# Altium PCB AO-VI.PcbDoc
Units mil, origin at the board's own origin, x right, y up, seen from the top; angles counter-clockwise.
Board outline 12846.15 x 9153.85 mil, 2 copper layers (TopLayer, BottomLayer); 52 components, 46 nets, 149 pads, 335 vias.
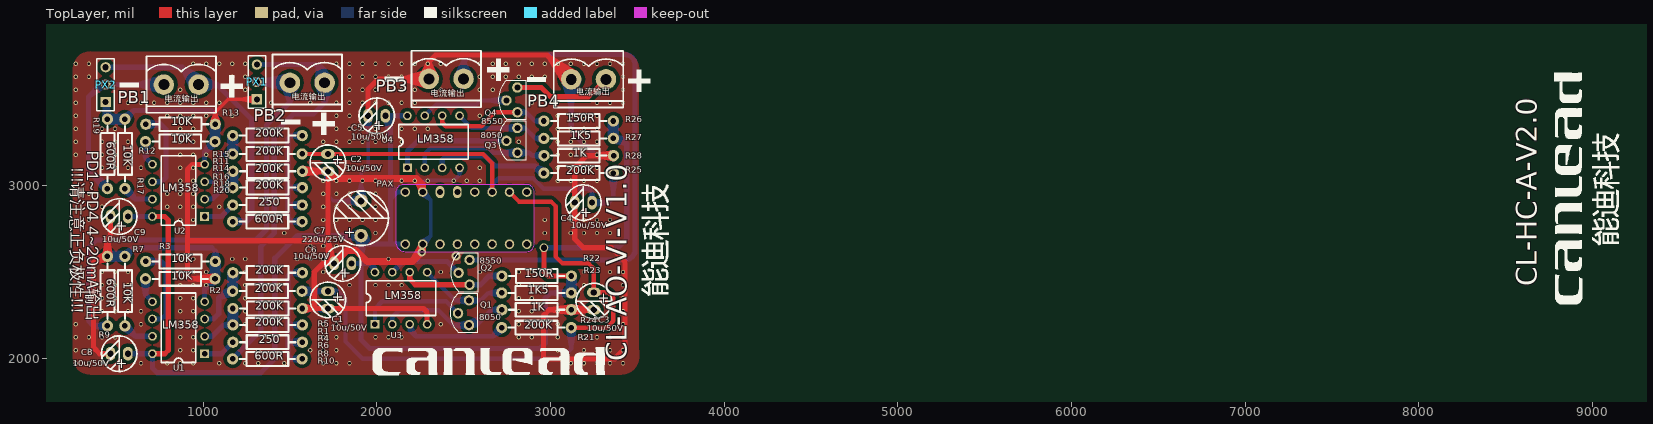
[diagram p0: TopLayer view]
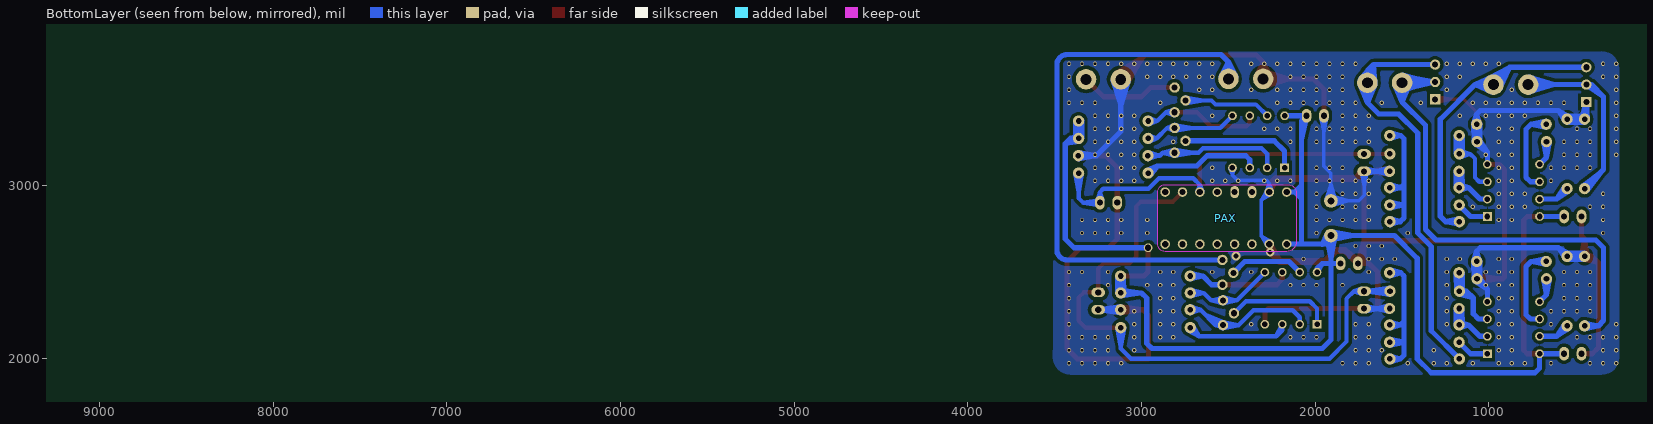
[diagram p1: BottomLayer view, seen from below]
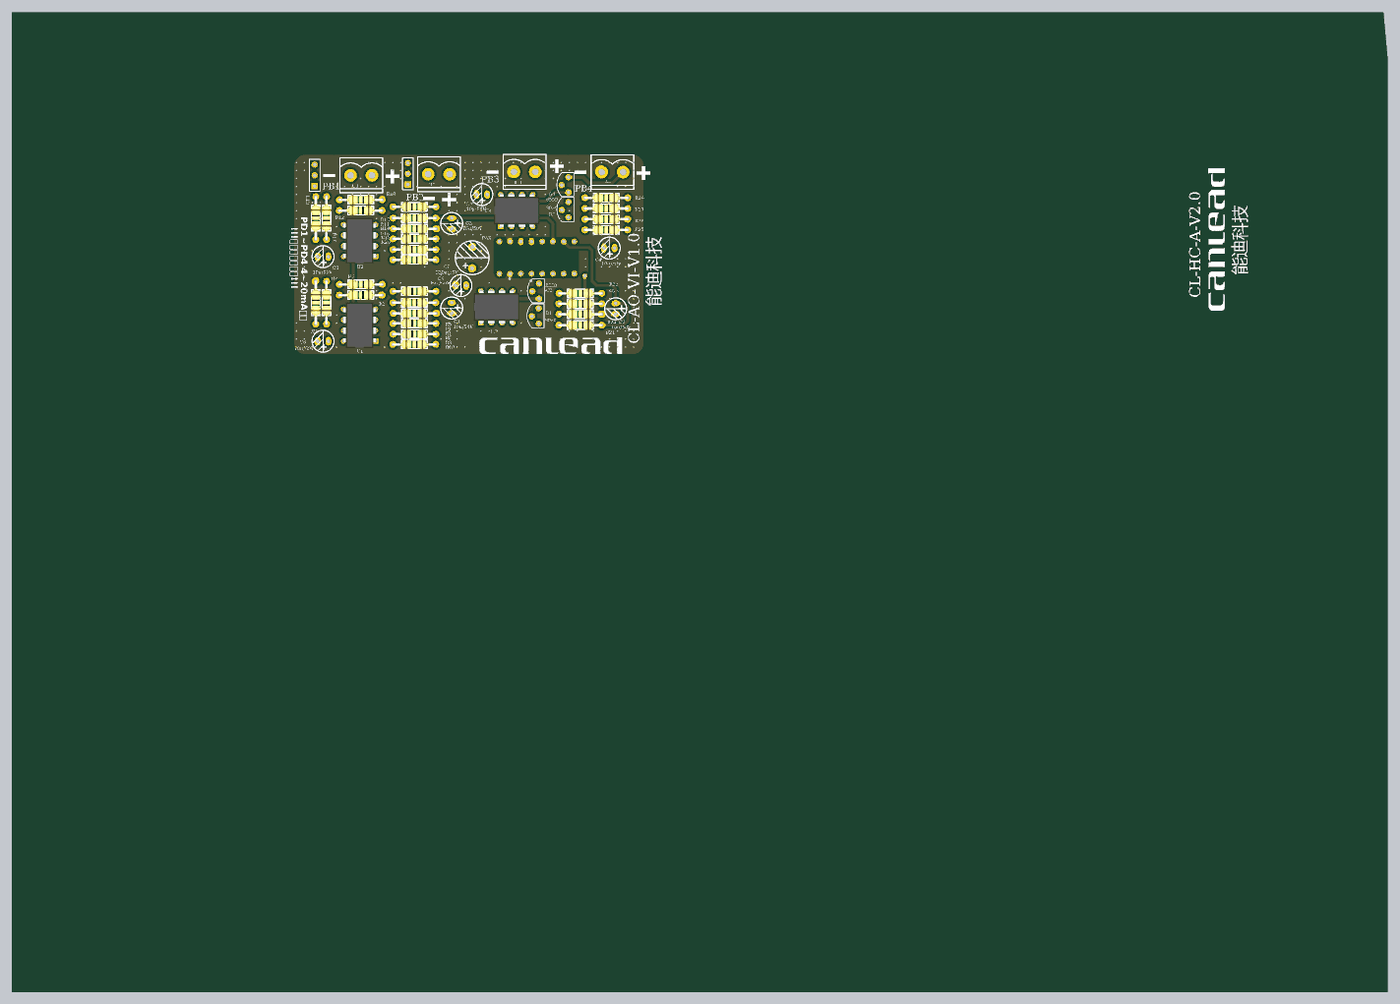
[diagram p2: 3D render of the assembled board from above, using the file's embedded part models]

## Layer stack, top to bottom
TopLayer: signal copper 1.4
Dielectric: dielectric 12.6, FR-4, Dk 4.8
BottomLayer: signal copper 1.4

## Board outline
10420.05,5102.18 -2387.64,5102.18 -2387.64,-4051.66 10458.51,-4051.66 10458.51,4679.11

## Design rules (kind name [scope] priority, off if disabled: settings)
Clearance Clearance_1 [All] p1: gap=20
Clearance [All] p2 off: gap=15
ComponentClearance [All] p1 off: gap=10 collisioncheckmode=3 verticalgap=10 showdistances=FALSE
FabricationTestPointUsage TestPointUsage [All] p1: valid=0 allowmultiple=FALSE
FabricationTestpoint Testpoint [All] p1: side=3 testpointundercomponent=TRUE minsize=40 maxsize=100 preferedsize=60 minholesize=20 maxholesize=40 preferedholesize=32 testpointgrid=1 allowsidetop=TRUE allowsidebottom=TRUE usegrid=TRUE gridtolerance=0.01
PolygonConnect PolygonConnect_1 [All vs (InPadClass('All Pads'))] p1: connectstyle=NoConnect reliefconductorwidth=10 reliefentries=4 polygonreliefangle="90 Angle"
PolygonConnect [All] p2: connectstyle=Direct reliefconductorwidth=10 reliefentries=4 polygonreliefangle="90 Angle"
RoomDefinition AO-VI [InComponentClass('AO-VI')] p1: confinementstyle=ConfineIn formatcopy=TRUE lockcomponents=FALSE outline 10503.51,-4096.2 21729.86,-4096.2 21729.86,-3053.79 10503.51,-3053.79
RoutingVias [All] p1: holewidth=24 width=40 viastyle="Through Hole" minholewidth=24 minwidth=40 maxholewidth=24 maxwidth=40
SilkscreenOverComponentPads [IsPad] p1: minsilkscreentomaskgap=10
SolderMaskExpansion [All] p1: expansion=4
Width [All] p1: maxlimit=300 minlimit=10 preferedwidth=30
24 further rules are at their usual default settings.

## Components (designator, comment, footprint, x,y, rotation, side; value= is the part's Value field where it differs from the comment)
C1 "10u/50V" E5MM 1719.12,2390 r270 top
C2 "10u/50V" E5MM 1719.12,3180 r270 top
C3 "10u/50V" E5MM 3250,2383.15 r270 top
C4 "10u/50V" E5MM 3240,2900 r180 top
C5 "10u/50V" E5MM 2050,3400 r180 top
C6 "10u/50V" E5MM 1854.55,2550 r180 top
C7 "220u/25V" E8MM 1910,2810 r90 top
C8 "10u/50V" E5MM 567.31,2030 r180 top
C9 "10u/50V" E5MM 567.31,2820 r180 top
PAX "Header 8X2" centipede-16 2514.54,2810.96 r90 bottom (schematic designator P19)
PB1 "电流输出" PL2X 874.36,3579.46 r180 top (schematic designator PB2)
PB2 "电流输出" PL2X 1600,3590 r180 top (schematic designator PB1)
PB3 "电流输出" PL2X 2400,3612.32 r180 top
PB4 "电流输出" PL2X 3220,3610 r180 top
PX1 "Header 3" HDR1X3 1310,3494.49 r90 top
PX2 "Header 3" HDR1X3 439.46,3479.46 r90 top
Q1 "8050" TO-92-B 2500,2265.76 r0 top
Q2 "8550" TO-92-B 2503.16,2498.64 r0 top
Q3 "8050" TO-92-B 2778.46,3258.64 r0 top
Q4 "8550" TO-92-B 2778.46,3491.36 r0 top
R1 "200K" AXIAL0.4 1569.48,2389.63 r180 top
R2 "10K" AXIAL0.4 1068.36,2460.89 r180 top
R3 "10K" AXIAL0.4 1069.93,2560.89 r180 top
R4 "200K" AXIAL0.4 1571.91,2290 r180 top
R5 "200K" AXIAL0.4 1172.44,2496.51 r0 top
R6 "200K" AXIAL0.4 1172.44,2196.51 r0 top
R7 "10K" AXIAL0.4 549.63,2191.05 r90 top
R8 "250" AXIAL0.4 1172.44,2096.51 r0 top
R9 "600R" AXIAL0.4 450,2590 r270 top
R10 "600R" AXIAL0.4 1570,2000 r180 top
R11 "200K" AXIAL0.4 1570,3180 r180 top
R12 "10K" AXIAL0.4 1068.36,3250.89 r180 top
R13 "10K" AXIAL0.4 1069.93,3350.89 r180 top
R14 "200K" AXIAL0.4 1571.91,3080 r180 top
R15 "200K" AXIAL0.4 1171.91,3286.14 r0 top
R16 "200K" AXIAL0.4 1172.44,2986.51 r0 top
R17 "10K" AXIAL0.4 549.63,2981.05 r90 top
R18 "250" AXIAL0.4 1171.91,2886.14 r0 top
R19 "600R" AXIAL0.4 450,3380 r270 top
R20 "600R" AXIAL0.4 1570,2790 r180 top
R21 "200K" AXIAL0.4 3119.48,2179.63 r180 top
R22 "150R" AXIAL0.4 3120.53,2477.12 r180 top
R23 "1K5" AXIAL0.4 3119.48,2379.63 r180 top
R24 "1K" AXIAL0.4 3120,2282.78 r180 top
R25 "200K" AXIAL0.4 3362.15,3069.63 r180 top
R26 "150R" AXIAL0.4 3362.15,3369.63 r180 top
R27 "1K5" AXIAL0.4 3362.15,3269.63 r180 top
R28 "1K" AXIAL0.4 3363.2,3170 r180 top
U1 "LM358" DIP8 1008.89,2030 r180 top
U2 "LM358" DIP8 1008.89,2820 r180 top
U3 "LM358" DIP8 1990,2199.64 r90 top
U4 "LM358" DIP8 2176.93,3100 r90 top

## Footprints (in the part's own frame and the unit in brackets; to place one, negate y for a bottom-side part, rotate by r counter-clockwise, add the part's x,y. Pads: shape width x height; smd on the part's side, far side on the other; paste and mask are expansions set on the pad)
AXIAL0.4 [mil]
  round 65 hole 32: 1(-0.52,-0.37) 2(399.48,-0.37)
  silkscreen extent 39,-40 359,40, body extent -12,-45 412,46, height 116
centipede-16 [mil]
  round 55 hole 36: 1(150,-350) 2(-150,-350) 3(150,-250) 4(-150,-250) 6(-150,-150) 8(-150,-50) 9(150,50) 10(-150,50) 11(150,150) 12(-150,150) 13(150,250) 14(-150,250) 15(150,350) 16(-150,350)
  oval 70x50 hole 36: 5(150,-150) 7(150,-50)
DIP8 [mil]
  rect 50x50 hole 32: 1(0,0)
  round 50 hole 32: 2(0,-100) 3(0,-200) 4(0,-300) 5(300,-300) 6(300,-200) 7(300,-100) 8(300,0)
  silkscreen extent 50,-350 250,50, body extent -5,-364 305,66, height 188
E5MM [mm]
  oval 1.4x2 hole 0.9: 1(0,0) 2(2.54,0)
  silkscreen extent -1.33,-2.6 3.87,2.6
E8MM [mm]
  round 2 hole 1: 1(-2.54,0) 2(2.54,0)
  silkscreen extent -4,-4 4,4, body extent -4.01,-4.04 4.01,3.99, height 7
HDR1X3 [mm] "Connector; Header; 3 Position"
  rect 1.5x1.5 hole 0.9: 1(0,0)
  round 1.5 hole 0.9: 2(2.54,0) 3(5.08,0)
  silkscreen extent -1.27,-1.27 6.35,1.27
PL2X [mm]
  round 3 hole 1.6: 1(-2.54,0) 2(2.54,0)
  silkscreen extent -5.08,-4.13 5.08,4.13
TO-92-B [mil]
  round 60 hole 35.43: 1(31.54,71.36) 2(-31.54,-2.99) 3(31.54,-71.36)
  silkscreen extent -77,-111 81,114

## Part data
C1 C2 C3 C4 C5 C6 C7 C8 C9: library part CAP, "Capacitor"
PAX: "Header, 8-Pin, Du"
PB1 PB2 PB3 PB4: library part "Header 2", "Header, 2-Pin"
PX1 PX2: "Header, 3-Pin"
Q1 Q3: library part NPN, "NPN Bipolar Transistor"
Q2 Q4: library part PNP, "PNP Bipolar Transistor"
R1 R2 R3 R4 R5 R6 R7 R8 R9 R10 R11 R12 R13 R14 R15 R16 R17 R18 R19 R20 R21 R22 R23 R24 R25 R26 R27 R28: library part RES2

## Free pads (board coordinates)
  round 50 hole 36: 0(2962.68,2640)

## Via types
v1: diameter 25, hole 15, TopLayer to BottomLayer, tented both sides, 333 vias
v2: diameter 50, hole 28, TopLayer to BottomLayer, tented both sides, 2 vias

## Nets (pads, with @x,y where several pads share a name; then routed paths per layer and width w, separated by ;. In a path a pad name is that pad's centre, name@x,y a point inside that pad or via, vN(x,y) a via of type N, cw(c..) or ccw(c..) an arc to the next point about the centre after c; other vN are vias at no path point)
10V-面板-温度输入: PAX.16
10V-面板-湿度输入: PAX.15
24V: C5.1 C6.1 C7.1 C8.1 C9.1 pad.0 PAX.1 PAX.2 R22.1 R23.1 R26.1 R27.1 U1.8 U2.8 U3.8 U4.8 | length 13753.1
  TopLayer w30: U1.8 780,2030 800,2050 800,2800 780,2820 U2.8 ; 2962.68,2525 pad.0 2962.68,2500.5 2985.7,2477.49 R22.1
  BottomLayer w30: C8.1 U1.8 708.89,1946.62 735.51,1920 1332.02,1920 1413.48,2001.46 1413.48,2580 1543.48,2710 C7.1 ; C9.1 U2.8 C9.1@593.89,2820 ; C6.1 1910,2550 ; C7.1@1874.21,2697.71 1910,2661.92 ; C7.1@1885.74,2707.7 1910,2580.63 C7.1@1934.26,2707.7 ; C7.1@1907.7,2685.74 1780.63,2710 C7.1@1907.7,2734.26 ; 1960.05,2659.95 1959.04,2660.96 ; 2080,3262.22 C5.1@2050,3388.19 ; PAX.2 2080,2660.96 ; PAX.1 2116.75,2960.96 ; U4.8 C5.1 2080,3370 ; pad.0 3390,2640 3440,2690 3440,3240 ; R23.1@3102.55,2378.62 R22.1@3103.62,2475.9 ; R23.1@3102.59,2381.76 R22.1 ; R23.1@3103.18,2384.84 R22.1@3138.48,2475.9 ; R23.1@3118.72,2362.55 3000,2380 ; R23.1@3118.72,2397.45 3000,2380 ; R23.1@3136.92,2384.49 R22.1@3103.62,2475.9 ; R23.1@3137.41,2378.24 R22.1@3138.48,2475.9 ; R23.1@3137.45,2381.38 R22.1 ; R26.1@3345.24,3368.47 R27.1 ; R26.1@3345.24,3371.53 R27.1@3345.24,3271.53 ; R26.1@3345.78,3365.45 R27.1@3380.11,3271.53 ; R27.1@3358.1,3253.11 3440,3240 ; R27.1@3370.69,3285.56 3440,3240 ; R26.1@3379.58,3365.45 R27.1@3345.24,3271.53 ; R26.1@3380.11,3368.47 R27.1 ; R26.1@3380.11,3371.53 R27.1@3380.11,3271.53 ; C7.1@1886.36,2704.06 1910,2660 ; C7.1@1886.36,2704.06 1910,2660 ; C7.1@1886.36,2704.06 1910,2660 ; C7.1@1886.43,2703.82 1910,2661.92 ; C7.1@1886.43,2703.82 1910,2661.92 ; C7.1@1886.43,2703.82 1910,2661.92 ; C7.1@1886.43,2703.82 1910,2661.92 ; C7.1@1886.52,2703.48 1910.96,2660.96 ; C7.1@1886.52,2703.48 1910.96,2660.96 ; C7.1@1886.52,2703.48 1910.96,2660.96 ; 1910,2550 1910,2110 1960,2060 2940.53,2060 2970,2089.47 2970,2350 3000,2380 ; 1910,2550 1910,2560 ; 1910,2560 1920,2550 1960.01,2550 ; 1910,2560 1910,2660 ; 1910,2660 1910.96,2660.96 ; 1910,2660 1910,2661.92 ; 1910,2660 C7.1@1933.64,2704.06 ; 1910,2660 C7.1 ; 1910,2660 C7.1@1933.64,2704.06 ; 1910,2660 C7.1@1933.64,2704.06 ; 1910,2661.92 C7.1 ; 1910,2661.92 1910.96,2660.96 ; 1910,2661.92 C7.1@1933.57,2703.82 ; 1910,2661.92 C7.1@1933.57,2703.82 ; 1910,2661.92 C7.1 ; 1910,2661.92 C7.1@1933.57,2703.82 ; 1910,2661.92 C7.1@1933.57,2703.82 ; 1910,2661.92 C7.1 ; C7.1 1959.04,2660.96 ; C7.1 1910.96,2660.96 ; C7.1 1910.96,2660.96 ; C7.1 1959.04,2660.96 ; C7.1 1910.96,2660.96 ; 1910.96,2660.96 1959.04,2660.96 ; 1910.96,2660.96 C7.1@1933.72,2704.41 ; 1910.96,2660.96 C7.1@1933.72,2704.41 ; 1910.96,2660.96 C7.1@1933.72,2704.41 ; 1959.04,2660.96 2080,2660.96 ; 1959.04,2660.96 1929.99,2723.94 1959.04,2660.96 ; 1959.04,2660.96 1896.06,2690.01 1959.04,2660.96 ; 1960.01,2550 1990,2520.01 U3.8 1960.01,2550 ; C5.1@2050,3388.19 2080,3370 ; C5.1@2050,3388.19 2080,3370 ; 2080,2660.96 2080,2924.21 ; 2080,2924.21 2116.75,2960.96 ; 2080,2924.21 2080,2997.71 ; 2080,2997.71 2116.75,2960.96 ; 2080,2997.71 2080,3370 ; 3000,2380 R23.1 ; R22.1@3103.62,2475.9 R23.1@3121.05,2381.05 ; R22.1@3103.62,2475.9 R23.1 ; R23.1 R23.1@3121.05,2381.05 ; R23.1 R22.1 ; R23.1 R22.1@3138.48,2475.9 ; R23.1@3121.05,2381.05 R22.1 ; R23.1@3121.05,2381.05 R22.1@3138.48,2475.9 ; R27.1@3345.24,3271.53 R26.1 ; R27.1 R26.1 ; R27.1 3410,3270 ; R27.1 3440,3240 ; R27.1 3410,3270 ; R26.1 R27.1@3380.11,3271.53 ; 3410,3270 3440,3240 ; 3410,3270 3365.91,3287.2 3410,3270 ; 3410,3270 3365.91,3252.8 3410,3270
24V-情报-负压: PAX.6
24V-情报-远值: PAX.7
24V-情报-远启: PAX.9
24V-面板-值机: PAX.10
24V-面板-故障: PAX.14
24V-面板-滤网: PAX.12
24V-面板-运行: PAX.8
GND: C1.2 C2.2 C3.2 C4.2 C5.2 C6.2 C7.2 C8.2 C9.2 PAX.3 PAX.4 PB3.2 PB4.2 PX1.1 PX2.1 R2.1 R3.1 R4.1 R7.2 R9.1 R12.1 R13.1 R14.1 R17.2 R19.1 R24.1 R28.1 U1.4 U2.4 U3.4 U4.4 | length 29628.9
  TopLayer w20: R13.1@1048.26,3354.91 1070.46,3420.46 ; R13.1 1070.46,3420.46 ; R13.1@1092.66,3354.91 1070.46,3420.46 ; PX1.1@1307.87,3475.08 1220.47,3494.49 PX1.1@1307.87,3513.9 ; PX1.1 1144.49,3494.49 1070.46,3420.46
  TopLayer w30: R9.1@432.2,2592.07 449.63,2689.63 ; R9.1@440.81,2605.64 370,2554.15 ; R9.1@455.28,2573.96 370,2554.15 ; R9.1@467.06,2592.07 449.63,2689.63 ; C8.2 405,2030 370,2065 370,2554.15 ; C9.2@467.31,2808.19 467.31,2707.31 ; C9.2 467.31,2707.31 ; U2.4 940,3120 910,3090 910,2680 ; R2.1@1067.64,2443.8 946.39,2461.25 R2.1@1067.64,2478.71 ; R2.1 918.74,2461.25 910,2470 910,2680 ; R4.1 1640,2290.37 ; R14.1@1573.63,3062.91 C2.2@1694.94,3080 ; R14.1@1573.74,3097.82 C2.2@1694.94,3080 ; R4.1@1574.7,2273.01 1640,2290.37 ; R4.1@1574.7,2307.72 1640,2290.37 ; R14.1@1589.75,3080 C2.2@1707.31,3080 ; R14.1@1589.75,3080.32 C2.2@1707.31,3080 ; R14.1@1590.1,3065.23 C2.2@1707.31,3080 ; R14.1@1590.13,3095.41 C2.2@1707.31,3080 ; C1.2@1707.31,2290 1640,2290.37 ; C1.2@1730.93,2290 1848.49,2290.37 ; C5.2 1950,3552.26 2010.06,3612.32 PB3.2 v1@2300,3710 ; C5.2@1950,3411.81 1950,3529.37 ; PB3.2@2257.08,3622.26 v1@2300,3710 ; U3.4 2290,2270.37 2270,2290.37 1640,2290.37 ; PB3.2@2293.49,3568.75 2150.94,3612.32 PB3.2@2293.49,3655.89 ; PB3.2@2342.92,3622.26 v1@2300,3710 ; PB4.2@3085.15,3583.06 2997.31,3732.69 ; R24.1@3119.28,2265.69 2998.03,2283.15 R24.1@3119.28,2300.6 ; R24.1@3120.63,2283.15 C3.2@3238.19,2283.15 ; R24.1@3121.78,2265.69 3243.03,2283.15 R24.1@3121.78,2300.6 ; R24.1@3121.83,2265.7 C3.2@3238.19,2283.15 ; R24.1@3121.83,2300.6 C3.2@3238.19,2283.15 ; 3140,2770.63 C4.2@3140,2888.19 ; C4.2@3140,2911.81 3140,3029.37 ; PB4.2@3146.94,3644.85 2997.31,3732.69 ; C3.2 R24.1 ; R28.1@3362.48,3152.91 3241.23,3170.37 R28.1@3362.48,3187.82 ; R28.1 3209.07,3170.37 3140,3101.3 C4.2 3140,2690 3190,2640 3350,2640 3430,2560 3430,2060 3370,2000 2961.46,2000 2960,2001.46 2960,2250.37 2992.78,2283.15 R24.1 ; 370,2554.15 406.38,2590.52 ; 370,2554.15 R9.1 ; 406.38,2590.52 R9.1 ; 406.38,2590.52 446.09,2573.39 406.38,2590.52 ; 406.38,2590.52 446.09,2607.66 406.38,2590.52 ; 406.38,2590.52 R9.1 ; R9.1 449.63,2689.63 ; 449.63,2689.63 467.31,2707.31 ; 910,2680 1719.12,2680 ; 1640,2290.37 1640,2500 1690,2550 ; 1690,2550 C6.2 1690,2550 ; 1690,2550 1719.12,2579.12 ; C2.2@1694.94,3080 R14.1 1572.8,3080 C2.2 1719.12,2680 ; 1719.12,2579.12 1719.12,2680 ; 1719.12,2579.12 C6.2@1754.55,2561.81 ; 1719.12,2579.12 C6.2@1754.55,2561.81 ; 1719.12,2680 C6.2@1754.55,2561.81 ; v1@2300,3710 2340,3750 2980,3750 PB4.2 2997.31,3732.69 ; R24.1 C3.2@3238.19,2283.15
  TopLayer w40: C2.2 1759.12,3040 ; C2.2@1730.93,3080 1759.12,3040 ; C6.2 1754.55,2550.28 1828.64,2624.37 ; C6.2@1754.55,2561.81 1828.64,2624.37 ; 1759.12,3040 2230,3040 ; 1828.64,2624.37 1880.46,2624.37 1943.58,2561.26 2207.27,2561.26 ; 2207.27,2561.26 v2@2264.54,2618.52 ; 2207.27,2561.26 PAX.4 ; 2230,3040 2264.54,3005.46 ; 2230,3040 PAX.3 ; v2@2264.54,2618.52 PAX.4 ; v2@2264.54,2618.52 PAX.4 ; PAX.3 2264.54,3005.46 ; PAX.3 2264.54,3005.46
  BottomLayer w20: R4.1@1575.08,2268.02 1664.94,2290 ; R14.1@1575.08,3058.02 1664.94,3080 ; R4.1@1575.26,2312.69 1664.94,2290 ; R14.1@1575.26,3102.69 1664.94,3080 ; C2.2@1701.65,3078.24 1719.12,2992.44 C2.2@1736.59,3078.24 ; C1.2@1705.55,2272.53 1619.75,2290 ; C1.2@1705.55,2307.47 1619.75,2290 ; C2.2@1705.55,3062.53 1619.75,3080 ; C2.2@1705.55,3097.47 1619.75,3080 ; C1.2@1707.31,2290 1619.75,2290 ; C2.2@1707.31,3080 1619.75,3080 ; C1.2 1572.8,2290 R4.1 1664.94,2290 ; C7.2@1880.95,2914.34 1910,3009.37 C7.2@1939.05,2914.34 ; C7.2@1905.66,2880.95 1810.63,2910 C7.2@1905.66,2939.05 ; C5.2@1932.53,3386.43 1950,3300.63 ; C5.2@1950,3388.19 1950,3300.63 ; C5.2 1950,3110 1910,3070 C7.2 1750.74,2910 1719.12,2941.61 C2.2 1572.8,3080 R14.1 1664.94,3080 ; C5.2@1967.47,3386.43 1950,3300.63 ; PAX.3@2247.31,2964.04 2264.54,3010.68 ; PAX.4@2253.96,2674.9 2310.17,2706.59 ; PAX.3@2253.96,2947.02 2310.17,2915.33 ; PAX.4 2310.17,2706.59 ; PAX.4@2278.48,2650.38 2310.17,2706.59 ; PAX.3@2278.48,2971.54 2310.17,2915.33 ; PAX.3@2281.77,2964.04 2264.54,3010.68 ; U4.4@2462.16,3097.38 2476.93,3057.07 ; U4.4 2476.93,3057.07 ; U4.4@2491.7,3097.38 2476.93,3057.07 ; 2264.54,3010.68 PAX.3 2310.17,2915.33 ; 2264.54,3010.68 2283.86,3030 2449.86,3030 2476.93,3057.07 ; 2310.17,2706.59 2310.17,2915.33
  BottomLayer w30: R19.1@466.82,3383.84 PX2.1 ; R7.2@539.27,2604.35 599.48,2640 ; R17.2@539.27,3394.35 599.48,3430 ; R7.2@545.47,2573.62 R9.1@451.16,2607.96 ; R7.2@545.47,2607.43 R9.1@451.16,2573.09 ; R17.2@545.47,3363.62 R19.1@451.16,3397.96 ; R17.2@545.47,3397.43 R19.1@451.16,3363.09 ; R7.2@548.47,2573.09 R9.1 ; R7.2@548.47,2607.96 R9.1 ; R17.2@548.47,3363.09 R19.1 ; R17.2@548.47,3397.96 R19.1 ; R7.2@551.53,2573.09 R9.1@451.16,2573.09 ; R7.2@551.53,2607.96 R9.1@451.16,2607.96 ; R17.2@551.53,3363.09 R19.1@451.16,3363.09 ; R17.2@551.53,3397.96 R19.1@451.16,3397.96 ; R7.2@563.82,2579.8 599.48,2640 ; R17.2@563.82,3369.8 599.48,3430 ; U1.4 1008.89,2401.25 ; U2.4 1008.89,3191.25 ; R2.1@1051.43,2460 R3.1@1053.03,2559.7 ; R2.1@1051.48,2463.06 R3.1 ; R2.1@1052.06,2466.06 R3.1@1087.89,2559.7 ; R13.1@1053.03,3349.7 R12.1@1070.46,3252.83 ; R13.1@1053,3350 R12.1 ; R13.1@1053.05,3353.06 R12.1@1051.48,3253.06 ; R3.1@1053.16,2563.88 1070.46,2619.54 ; R13.1@1053.16,3353.88 1070.46,3409.54 ; R13.1@1053.49,3346.97 R12.1@1086.34,3252.51 ; R2.1@1055.3,2472.29 1008.89,2401.25 ; R12.1@1055.3,3262.29 1008.89,3191.25 ; R2.1@1079.92,2447.67 1008.89,2401.25 ; R12.1@1079.92,3237.67 1008.89,3191.25 ; R2.1@1085.85,2465.54 R3.1@1053.03,2559.7 ; R2.1@1086.29,2459.45 R3.1@1087.89,2559.7 ; R2.1@1086.34,2462.51 R3.1 ; R13.1@1087.28,3346.44 R12.1@1051.48,3253.06 ; R3.1@1087.76,2563.88 1070.46,2619.54 ; R13.1@1087.76,3353.88 1070.46,3409.54 ; R13.1@1087.86,3349.45 R12.1 ; R13.1@1087.89,3349.7 R12.1@1070.46,3252.83 ; R13.1@1087.91,3352.51 R12.1@1086.34,3252.51 ; PB4.2@3076.43,3603.49 3120,3460.94 PB4.2@3163.57,3603.49 ; PB4.2 3120,3310 v1@3259.63,3170.37 ; R24.1@3120.63,2283.15 C3.2@3238.19,2283.15 ; R24.1@3121.78,2265.69 3243.03,2283.15 R24.1@3121.78,2300.6 ; R24.1@3121.83,2265.7 C3.2@3238.19,2283.15 ; R24.1@3121.83,2300.6 C3.2@3238.19,2283.15 ; C3.2 R24.1 C3.2@3238.19,2283.15 ; R28.1@3362.26,3152.93 v1@3259.63,3170.37 ; R28.1@3362.26,3187.81 v1@3259.63,3170.37 ; R28.1 v1@3259.63,3170.37 ; PX2.1 439.46,3400.53 PX2.1 ; PX2.1 432.13,3380.27 PX2.1 ; PX2.1 R19.1 ; R9.1 R7.2 ; R19.1 R17.2 ; R9.1@451.16,2573.09 R7.2 ; R9.1@451.16,2607.96 R7.2 ; R19.1@451.16,3363.09 R17.2 ; R19.1@451.16,3397.96 R17.2 ; R7.2 599.48,2640 ; R17.2 599.48,3430 ; 599.48,2640 1050,2640 1070.46,2619.54 ; 599.48,3430 1050,3430 1070.46,3409.54 ; 1008.89,2401.25 R2.1 ; 1008.89,2401.25 R2.1 ; 1008.89,3191.25 R12.1@1070.46,3252.83 ; 1008.89,3191.25 R12.1 ; R12.1@1051.48,3253.06 R13.1 ; R12.1@1051.48,3253.06 R13.1 ; R3.1@1053.03,2559.7 R2.1@1070.46,2462.83 ; R3.1@1053.03,2559.7 R2.1 ; R2.1 R2.1@1070.46,2462.83 ; R2.1 R3.1 ; R2.1 R3.1@1087.89,2559.7 ; R12.1 R13.1 ; R12.1 R13.1 ; R2.1@1070.46,2462.83 R3.1 ; R2.1@1070.46,2462.83 R3.1@1087.89,2559.7 ; R3.1 1070.46,2619.54 ; R12.1@1070.46,3252.83 R13.1 ; R12.1@1070.46,3252.83 R13.1 ; R13.1 1070.46,3409.54 ; R13.1 R12.1@1086.34,3252.51
  other v1: 268.12,1975.26 343.12,1975.26 418.12,1975.26 643.12,1975.26 793.12,1975.26 868.12,1975.26 943.12,1975.26 1093.12,1975.26 1243.12,1975.26 1318.12,1975.26 1468.12,1975.26 1693.12,1975.26 1768.12,1975.26 1843.12,1975.26 3118.12,1975.26 3193.12,1975.26 3268.12,1975.26 3343.12,1975.26 3418.12,1975.26 268.12,2050.26 343.12,2050.26 868.12,2050.26 943.12,2050.26 1318.12,2050.26 1618.12,2050.26 1693.12,2050.26 1768.12,2050.26 3043.12,2050.26 3193.12,2050.26 3268.12,2050.26 3343.12,2050.26 3418.12,2050.26 268.12,2125.26 343.12,2125.26 418.12,2125.26 493.12,2125.26 868.12,2125.26 943.12,2125.26 1693.12,2125.26 1768.12,2125.26 1993.12,2125.26 2068.12,2125.26 2143.12,2125.26 2818.12,2125.26 2893.12,2125.26 3043.12,2125.26 3193.12,2125.26 3268.12,2125.26 3343.12,2125.26 3418.12,2125.26 268.12,2200.26 643.12,2200.26 868.12,2200.26 943.12,2200.26 1243.12,2200.26 1693.12,2200.26 1768.12,2200.26 2368.12,2200.26 2818.12,2200.26 2893.12,2200.26 3043.12,2200.26 3418.12,2200.26 418.12,2275.26 493.12,2275.26 568.12,2275.26 643.12,2275.26 868.12,2275.26 943.12,2275.26 1243.12,2275.26 2818.12,2275.26 2893.12,2275.26 3043.12,2275.26 3418.12,2275.26 418.12,2350.26 493.12,2350.26 568.12,2350.26 868.12,2350.26 943.12,2350.26 1243.12,2350.26 2818.12,2350.26 2893.12,2350.26 3418.12,2350.26 418.12,2425.26 493.12,2425.26 568.12,2425.26 868.12,2425.26 943.12,2425.26 1018.12,2425.26 1243.12,2425.26 1843.12,2425.26 1993.12,2425.26 2068.12,2425.26 2143.12,2425.26 2818.12,2425.26 2893.12,2425.26 2968.12,2425.26 3193.12,2425.26 3418.12,2425.26 418.12,2500.26 493.12,2500.26 568.12,2500.26 868.12,2500.26 943.12,2500.26 1018.12,2500.26 1243.12,2500.26 1693.12,2500.26 2368.12,2500.26 2593.12,2500.26 2818.12,2500.26 2893.12,2500.26 3193.12,2500.26 3343.12,2500.26 3418.12,2500.26 868.12,2575.26 943.12,2575.26 1168.12,2575.26 1243.12,2575.26 1543.12,2575.26 1618.12,2575.26 1693.12,2575.26 2068.12,2575.26 1618.12,2650.26 1693.12,2650.26 1768.12,2650.26 343.12,2725.26 1468.12,2725.26 1993.12,2725.26 2968.12,2725.26 3118.12,2725.26 3193.12,2725.26 3268.12,2725.26 3343.12,2725.26 343.12,2800.26 868.12,2800.26 943.12,2800.26 1693.12,2800.26 1768.12,2800.26 1843.12,2800.26 1918.12,2800.26 1993.12,2800.26 2968.12,2800.26 3118.12,2800.26 3193.12,2800.26 3268.12,2800.26 3343.12,2800.26 343.12,2875.26 418.12,2875.26 793.12,2875.26 868.12,2875.26 943.12,2875.26 1093.12,2875.26 1693.12,2875.26 1768.12,2875.26 1843.12,2875.26 1993.12,2875.26 343.12,2950.26 793.12,2950.26 868.12,2950.26 943.12,2950.26 1693.12,2950.26 1768.12,2950.26 1843.12,2950.26 1993.12,2950.26 643.12,3025.26 868.12,3025.26 943.12,3025.26 1693.12,3025.26 1768.12,3025.26 1843.12,3025.26 1918.12,3025.26 1993.12,3025.26 2143.12,3025.26 2218.12,3025.26 2293.12,3025.26 2443.12,3025.26 2518.12,3025.26 2593.12,3025.26 3043.12,3025.26 3118.12,3025.26 3193.12,3025.26 3268.12,3025.26 418.12,3100.26 493.12,3100.26 568.12,3100.26 643.12,3100.26 868.12,3100.26 943.12,3100.26 1843.12,3100.26 1918.12,3100.26 1993.12,3100.26 2593.12,3100.26 3043.12,3100.26 3118.12,3100.26 3193.12,3100.26 3268.12,3100.26 268.12,3175.26 418.12,3175.26 493.12,3175.26 568.12,3175.26 868.12,3175.26 943.12,3175.26 1018.12,3175.26 3043.12,3175.26 3118.12,3175.26 3193.12,3175.26 3268.12,3175.26 268.12,3250.26 418.12,3250.26 493.12,3250.26 568.12,3250.26 868.12,3250.26 943.12,3250.26 1693.12,3250.26 1768.12,3250.26 1843.12,3250.26 1918.12,3250.26 1993.12,3250.26 2143.12,3250.26 2818.12,3250.26 3043.12,3250.26 3118.12,3250.26 3193.12,3250.26 3268.12,3250.26 268.12,3325.26 418.12,3325.26 493.12,3325.26 868.12,3325.26 943.12,3325.26 1693.12,3325.26 1768.12,3325.26 1843.12,3325.26 1918.12,3325.26 1993.12,3325.26 2143.12,3325.26 2218.12,3325.26 2293.12,3325.26 3043.12,3325.26 3118.12,3325.26 3193.12,3325.26 3268.12,3325.26 268.12,3400.26 793.12,3400.26 868.12,3400.26 943.12,3400.26 1018.12,3400.26 1168.12,3400.26 1693.12,3400.26 1768.12,3400.26 1843.12,3400.26 2593.12,3400.26 3043.12,3400.26 3118.12,3400.26 3193.12,3400.26 3268.12,3400.26 268.12,3475.26 568.12,3475.26 643.12,3475.26 718.12,3475.26 793.12,3475.26 868.12,3475.26 943.12,3475.26 1018.12,3475.26 1093.12,3475.26 1393.12,3475.26 1618.12,3475.26 1768.12,3475.26 1843.12,3475.26 1918.12,3475.26 1993.12,3475.26 2068.12,3475.26 2143.12,3475.26 2218.12,3475.26 2893.12,3475.26 3268.12,3475.26 3343.12,3475.26 3418.12,3475.26 268.12,3550.26 868.12,3550.26 1243.12,3550.26 1843.12,3550.26 1918.12,3550.26 1993.12,3550.26 2068.12,3550.26 2143.12,3550.26 2218.12,3550.26 2368.12,3550.26 2593.12,3550.26 2668.12,3550.26 3418.12,3550.26 268.12,3625.26 343.12,3625.26 1168.12,3625.26 1243.12,3625.26 1843.12,3625.26 1918.12,3625.26 1993.12,3625.26 2068.12,3625.26 2143.12,3625.26 2593.12,3625.26 2668.12,3625.26 2743.12,3625.26 2818.12,3625.26 2893.12,3625.26 2968.12,3625.26 3418.12,3625.26 268.12,3700.26 343.12,3700.26 943.12,3700.26 1018.12,3700.26 1093.12,3700.26 1168.12,3700.26 1243.12,3700.26 1768.12,3700.26 1843.12,3700.26 1918.12,3700.26 1993.12,3700.26 2068.12,3700.26 2143.12,3700.26 2218.12,3700.26 2293.12,3700.26 2368.12,3700.26 2593.12,3700.26 2668.12,3700.26 2743.12,3700.26 2818.12,3700.26 2893.12,3700.26 2968.12,3700.26 3043.12,3700.26 3118.12,3700.26 3193.12,3700.26 3268.12,3700.26 3343.12,3700.26 3418.12,3700.26
  other v2: 2456.43,2593.01 2260,2613.98
MAOUT1+: PB1.1 PX2.3 R20.2 | length 2434.6
  BottomLayer w30: PX2.3 880,3679.46 ; PB1.1@937.89,3554.75 880,3679.46 ; PB1.1@983.5,3536.37 1080.54,3579.46 ; PB1.1@983.5,3622.56 1080.54,3579.46 ; PB1.1@1001.15,3614.44 880,3679.46 ; R20.2 1250.52,2790.37 ; R20.2@1172.44,2772.97 1250.52,2790.37 ; R20.2@1172.44,2807.76 1250.52,2790.37 ; 880,3679.46 974.36,3585.1 PB1.1 ; 880,3679.46 PB1.1 ; PB1.1 1080.54,3579.46 ; 1080.54,3579.46 1280,3380 1280,2819.84 1250.52,2790.37
MAOUT1-: PB1.2 PX2.2 R19.2 | length 1759.4
  BottomLayer w30: R19.2@436.49,2968.97 353.49,3076.66 R19.2@461.19,2993.67 ; R19.2 340,3090.16 340,3510 ; PB1.2@767.85,3535.89 625.31,3579.46 PB1.2@767.85,3623.03 ; PB1.2 469.46,3579.46 409.46,3579.46 ; 340,3510 409.46,3579.46 ; 340,3510 PX2.2 409.46,3579.46
MAOUT2+: PB4.1 Q4.1 | length 573.3
  TopLayer w30: Q4.1 2947.28,3562.72 3000,3510 3220,3510 PB4.1
MAOUT11+: PB2.1 PX1.3 R10.2 | length 3260.7
  BottomLayer w30: R10.2 1332.02,2161.86 1332.02,2647.88 1410,2725.86 1410,3300 1520,3410 1635,3410 1700,3475 ; PX1.3 1665.51,3694.49 ; PB2.1@1656.25,3584.85 1665.51,3694.49 ; PB2.1@1656.76,3581.56 1700,3475 ; PB2.1@1738.22,3611.9 1665.51,3694.49 ; PB2.1@1743.24,3581.56 1700,3475 ; 1665.51,3694.49 1700,3660 ; 1665.51,3694.49 PB2.1 ; 1700,3475 PB2.1 ; PB2.1 1700,3660 ; PB2.1 1700,3660 ; 1700,3660 1658.18,3603.86 1700,3660 ; 1700,3660 1741.82,3603.86 1700,3660
MAOUT11-: PB2.2 PX1.2 R9.2 | length 4020.9
  BottomLayer w30: R9.2@447.71,2173.13 370,2190.52 ; R9.2@447.71,2207.92 370,2190.52 ; R9.2 370,2190.52 ; 1429.58,3592.12 PX1.2 ; 1431.67,3616.53 PX1.2 ; 1432.03,3567.01 PX1.2 ; PB2.2@1456.84,3581.18 1500,3480 ; PB2.2@1492.19,3546.64 1350.86,3594.49 ; PB2.2@1494.81,3633.75 1350.86,3594.49 ; PB2.2@1543.16,3581.18 1500,3480 ; 370,2190.52 340,2220.52 340,2640 385,2685 1305.5,2685 1365,2744.5 1365,3345 1500,3480 ; PX1.2 1495.51,3594.49 PB2.2 ; PX1.2 1350.86,3594.49 ; PX1.2 1350.86,3594.49 ; PX1.2 1350.86,3594.49 ; 1350.86,3594.49 PB2.2 ; 1500,3480 PB2.2
MAOUT21+: PB3.1 Q2.1 | length 3384.1
  BottomLayer w30: PB3.1@2457.08,3622.26 2500,3710 ; PB3.1 2500,3710 ; Q2.1 3430,2570 ccw(c3430,2627.5) 3487.5,2627.5 3487.5,3695 ccw(c3430,3695) 3430,3752.5 2542.5,3752.5 2500,3710 ; PB3.1@2542.92,3622.26 2500,3710
NetQ1_1: Q1.1 R23.2 U3.5 | length 1121
  BottomLayer w25: U3.5 2452.52,2337.12 ; Q1.1@2529.6,2319.72 2452.52,2337.12 ; Q1.1@2529.6,2354.51 2452.52,2337.12 ; Q1.1@2533.79,2319.76 2599.42,2337.12 ; Q1.1@2533.79,2354.47 2599.42,2337.12 ; R23.2@2717.43,2360.17 2642.31,2380 ; R23.2@2717.43,2399.83 2642.31,2380 ; 2452.52,2337.12 Q1.1 ; 2452.52,2337.12 Q1.1 ; Q1.1 2599.42,2337.12 ; 2599.42,2337.12 2642.31,2380 ; 2642.31,2380 R23.2 2642.31,2380
NetQ1_2: Q1.2 U3.1 | length 615.3
  BottomLayer w25: U3.1 1990,2290 2032.53,2332.53 2398.7,2332.53 Q1.2
NetQ1_3: Q1.3 R24.2 U3.2 | length 1774.3
  BottomLayer w25: U3.2 2090,2240 2130,2280 2356.14,2280 2441.74,2194.4 ; Q1.3@2523.62,2210.01 2634.98,2256.63 ; Q1.3@2529.83,2176.98 2441.74,2194.4 ; Q1.3@2529.83,2211.82 2441.74,2194.4 ; Q1.3@2541.62,2180.1 2634.98,2256.63 ; R24.2@2717.14,2263.44 2661.49,2283.15 ; R24.2@2717.14,2302.86 2661.49,2283.15 ; 2441.74,2194.4 Q1.3 ; 2441.74,2194.4 Q1.3 ; Q1.3 2572.74,2194.4 ; Q1.3 2634.98,2256.63 ; Q1.3 2572.74,2194.4 ; 2572.74,2194.4 2661.49,2283.15 ; 2572.74,2194.4 2535.25,2211.5 2572.74,2194.4 ; 2572.74,2194.4 2535.25,2177.3 2572.74,2194.4 ; 2661.49,2283.15 R24.2 2661.49,2283.15
NetQ2_2: Q2.2 U3.7 | length 527.1
  BottomLayer w30: U3.7 2151.62,2561.26 2406.02,2561.26 ; 2406.02,2561.26 Q2.2 2406.02,2561.26
NetQ2_3: Q2.3 R22.2 U3.6 | length 952.4
  TopLayer w30: 2414.69,2427.28 Q2.3 2222.35,2427.28 2190,2459.64 ; 2190,2459.64 U3.6 ; 2190,2459.64 U3.6 ; 2190,2459.64 U3.6
  BottomLayer w30: Q2.3 2597.28,2427.28 2647.49,2477.49 ; R22.2@2718.97,2460.11 2647.49,2477.49 ; R22.2@2718.97,2494.86 2647.49,2477.49 ; R22.2 2647.49,2477.49
NetQ3_1: Q3.1 R27.2 U4.5 | length 1040
  BottomLayer w25: U4.5 2546.93,3330 Q3.1 ; Q3.1@2808.54,3312.56 2705,3330 ; Q3.1@2808.54,3347.44 2705,3330 ; Q3.1@2813.55,3312.86 2853.17,3330 ; Q3.1@2813.55,3347.14 2853.17,3330 ; R27.2@2958.64,3250.41 2913.17,3270 ; R27.2@2958.64,3289.59 2913.17,3270 ; R27.2 2913.17,3270 ; 2705,3330 Q3.1 ; Q3.1 2853.17,3330 ; 2853.17,3330 2913.17,3270
NetQ3_2: Q3.2 U4.1 | length 811
  BottomLayer w30: U4.1 2176.93,3196.56 2236.02,3255.65 Q3.2 2626.93,3255.65
NetQ3_3: Q3.3 R28.2 U4.2 | length 1386.8
  BottomLayer w25: U4.2 2276.93,3179.91 2310.17,3213.15 2646.85,3213.15 2672.72,3187.28 Q3.3 ; Q3.3@2808.54,3169.84 2705,3187.28 ; Q3.3@2808.54,3204.72 2705,3187.28 ; Q3.3@2812.25,3169.93 2878.17,3187.28 ; Q3.3@2812.25,3204.64 2878.17,3187.28 ; R28.2@2960.81,3150.58 2895.09,3170.37 ; R28.2@2960.81,3190.15 2895.09,3170.37 ; R28.2 2895.09,3170.37 ; 2705,3187.28 Q3.3 ; Q3.3 2878.17,3187.28 ; 2878.17,3187.28 2895.09,3170.37
NetQ4_2: Q4.2 U4.7 | length 821.6
  BottomLayer w25: U4.7 2341.93,3465 2574.54,3465 2597.91,3488.37 Q4.2 2641.93,3488.37 ; Q4.2@2745.47,3470.93 2641.93,3488.37 ; Q4.2@2745.47,3505.81 2641.93,3488.37
NetQ4_3: Q4.3 R26.2 U4.6 | length 986.2
  TopLayer w25: Q4.3 2681.5,3420 2601.5,3340 2396.73,3340 2376.93,3359.8 ; 2376.93,3359.8 U4.6 2376.93,3359.8
  BottomLayer w25: Q4.3 2860,3420 ; Q4.3@2813.06,3402.77 2860,3420 ; Q4.3@2813.06,3437.23 2860,3420 ; R26.2@2958.88,3350.36 2910,3370 ; R26.2@2958.88,3389.64 2910,3370 ; 2860,3420 2910,3370 ; 2910,3370 R26.2 2910,3370
NetR1_2: R1.2 R5.1 U1.3 | length 2059.1
  BottomLayer w30: U1.3 1060,2230 1090,2260 1090,2350 ; R1.2@1152.54,2388.87 R5.1@1154.47,2494.67 ; R1.2@1152.59,2391.76 R5.1 ; R1.2@1153.11,2394.58 R5.1@1189.35,2494.67 ; R1.2@1160.68,2404.81 1090,2350 ; R1.2@1176.26,2373.66 1090,2350 ; R1.2@1187.04,2393.99 R5.1@1154.47,2494.67 ; R1.2@1187.41,2388.24 R5.1@1189.35,2494.67 ; R1.2@1187.46,2391.13 R5.1 ; 1090,2350 1130,2390 ; 1090,2350 R1.2 ; 1130,2390 R1.2 ; 1130,2390 1166.17,2372.92 1130,2390 ; 1130,2390 1166.17,2407.08 1130,2390 ; 1130,2390 R1.2 ; 1130,2390 R1.2 ; R5.1@1154.47,2494.67 R1.2@1171.91,2391.91 ; R5.1@1154.47,2494.67 R1.2 ; R1.2 R1.2@1171.91,2391.91 ; R1.2 R5.1 ; R1.2 R5.1@1189.35,2494.67 ; R1.2@1171.91,2391.91 R5.1 ; R1.2@1171.91,2391.91 R5.1@1189.35,2494.67
NetR2_2: R2.2 U1.5 | length 330.3
  BottomLayer w30: R2.2@651.47,2459.58 668.89,2370 ; R2.2 668.89,2370 ; R2.2@686.31,2459.58 668.89,2370 ; U1.5 668.89,2370
NetR3_2: R3.2 U1.6 | length 666.8
  BottomLayer w30: R3.2 757.37,2561.26 ; R3.2@672.22,2543.84 757.37,2561.26 ; R3.2@672.22,2578.67 757.37,2561.26 ; U1.6 761.61,2230 786.12,2254.51 786.12,2532.5 757.37,2561.26
NetR4_2: R4.2 R6.1 U1.2 | length 1859.8
  BottomLayer w30: U1.2 1051.37,2130 1117.51,2196.14 ; R6.1@1154.48,2194.62 R4.2@1155.01,2288.73 ; R6.1@1155.11,2201.05 R4.2@1189.86,2288.73 ; R6.1@1169.1,2178.87 1117.51,2196.14 ; R6.1@1169.1,2213.42 1117.51,2196.14 ; R6.1@1188.76,2200.87 R4.2@1155.01,2288.73 ; R6.1@1189.33,2194.42 R4.2@1189.86,2288.73 ; 1117.51,2196.14 R6.1 ; 1117.51,2196.14 R6.1 ; R4.2@1155.01,2288.73 R6.1@1172.44,2196.67 ; R4.2@1155.01,2288.73 R6.1 ; R6.1 R6.1@1172.44,2196.67 ; R6.1 R4.2 ; R6.1 R4.2@1189.86,2288.73 ; R6.1 R4.2 ; R6.1@1172.44,2196.67 R4.2 ; R6.1@1172.44,2196.67 R4.2@1189.86,2288.73 ; R6.1@1172.44,2196.67 R4.2 ; R4.2 1154.5,2197.87 R4.2 ; R4.2 1189.34,2197.67 R4.2
NetR5_2: R5.2 R6.2 R8.2 R10.1 | length 1343.1
  BottomLayer w30: R10.1@1567.97,1983.05 1510.53,2000.37 ; R10.1@1567.97,2017.68 1510.53,2000.37 ; R6.2@1569.44,2178.82 1510,2196.14 ; R6.2@1569.44,2213.47 1510,2196.14 ; R5.2@1569.51,2478.81 1508.05,2496.14 ; R5.2@1569.51,2513.48 1508.05,2496.14 ; R8.2@1570.04,2078.74 1490,2096.14 ; R8.2@1570.04,2113.54 1490,2096.14 ; R10.1 1510.53,2000.37 ; R8.2 1490,2096.14 ; R6.2 1510,2196.14 ; R5.2 1508.05,2496.14 ; 1490,2096.14 1490,2020.89 1510.53,2000.37 ; 1490,2096.14 1490,2216.14 ; 1490,2216.14 1490,2478.09 1508.05,2496.14 ; 1490,2216.14 1510,2196.14
NetR7_1: R7.1 U1.7 | length 355.1
  BottomLayer w30: R7.1@538.96,2176.95 610.52,2130 ; R7.1 610.52,2130 ; R7.1@563.57,2201.57 610.52,2130 ; U1.7 610.52,2130
NetR8_1: R8.1 U1.1 | length 190.4
  BottomLayer w30: U1.1 1105.77,2030 R8.1
NetR11_2: R11.2 R15.1 U2.3 | length 1743.9
  BottomLayer w25: U2.3 1055.49,3020 1080.54,3045.05 1080.54,3153.32 1107.58,3180.37 ; R15.1@1151.48,3283.86 R11.2@1171.39,3181.23 ; R15.1@1151.46,3284.04 R11.2 ; R15.1@1151.49,3287.84 R11.2@1150.63,3182.43 ; R15.1@1152.15,3280.31 R11.2@1190.45,3182.1 ; R11.2@1167.35,3160.62 1107.58,3180.37 ; R11.2@1167.35,3200.11 1107.58,3180.37 ; R15.1@1190.53,3280 R11.2@1150.63,3182.43 ; R15.1@1191.28,3283.72 R11.2 ; R15.1@1191.29,3283.86 R11.2@1171.39,3181.23 ; R15.1@1191.31,3287.51 R11.2@1190.45,3182.1 ; 1107.58,3180.37 R11.2 ; 1107.58,3180.37 R11.2 ; R11.2@1150.63,3182.43 R15.1 ; R11.2 R11.2@1171.39,3181.23 ; R11.2 R15.1 ; R11.2@1171.39,3181.23 R15.1 ; R15.1 R11.2@1190.45,3182.1
NetR12_2: R12.2 U2.5 | length 330.3
  BottomLayer w30: R12.2@651.47,3249.58 668.89,3160 ; R12.2 668.89,3160 ; R12.2@686.31,3249.58 668.89,3160 ; U2.5 668.89,3160
NetR13_2: R13.2 U2.6 | length 719.5
  BottomLayer w30: R13.2 757.37,3351.26 ; R13.2@672.22,3333.84 757.37,3351.26 ; R13.2@672.22,3368.67 757.37,3351.26 ; 757.37,3351.26 786.12,3322.5 786.12,3044.51 761.61,3020 ; 761.61,3020 U2.6 761.61,3020
NetR14_2: R14.2 R16.1 U2.2 | length 1483.5
  BottomLayer w30: U2.2 1051.37,2920 1117.51,2986.14 ; R14.2@1155.01,3078.73 R16.1@1172.44,2986.67 ; R14.2@1155,3078.84 R16.1 ; R14.2@1155.02,3082.09 R16.1@1154.5,2987.87 ; R14.2@1155.59,3075.64 R16.1@1189.34,2987.67 ; R16.1@1169.1,2968.87 1117.51,2986.14 ; R16.1@1169.1,3003.42 1117.51,2986.14 ; R14.2@1189.23,3075.45 R16.1@1154.5,2987.87 ; R14.2@1189.85,3078.65 R16.1 ; R14.2@1189.86,3078.73 R16.1@1172.44,2986.67 ; R14.2@1189.87,3081.9 R16.1@1189.34,2987.67 ; 1117.51,2986.14 R16.1 ; 1117.51,2986.14 R16.1 ; R16.1@1154.5,2987.87 R14.2 ; R16.1 R16.1@1172.44,2986.67 ; R16.1 R14.2 ; R16.1@1172.44,2986.67 R14.2 ; R14.2 R16.1@1189.34,2987.67
NetR15_2: R15.2 R16.2 R18.2 R20.1 | length 1607.6
  BottomLayer w30: R20.1@1567.97,2773.05 1510.53,2790.37 ; R20.1@1567.97,2807.68 1510.53,2790.37 ; R15.2@1568.87,3268.46 1508.05,3286.14 ; R15.2@1569.07,3303.12 1508.05,3286.14 ; R18.2@1569.43,2868.39 1490,2886.14 ; R16.2@1569.44,2968.82 1510,2986.14 ; R16.2@1569.44,3003.47 1510,2986.14 ; R18.2@1569.58,2903.18 1490,2886.14 ; R18.2 1490,2886.14 ; R15.2 1508.05,3286.14 ; R18.2@1571.91,2886.14 1490,2886.14 ; R15.2@1571.91,3286.14 1508.05,3286.14 ; 1490,2886.14 1490,3006.14 ; 1490,2886.14 1490,2810.89 1510.53,2790.37 ; 1490,3006.14 1510,2986.14 ; 1490,3006.14 1490,3268.09 1508.05,3286.14 ; 1510,2986.14 R16.2 1510,2986.14 ; 1510.53,2790.37 R20.1 1510.53,2790.37
NetR17_1: R17.1 U2.7 | length 539.1
  BottomLayer w30: R17.1@538.96,2966.95 610.52,2920 ; R17.1@563.57,2991.57 610.52,2920 ; 610.52,2920 R17.1 610.52,2920 ; 610.52,2920 U2.7 610.52,2920
NetR18_1: R18.1 U2.1 | length 287.3
  BottomLayer w30: R18.1@1171.91,2886.14 1105.77,2820 ; 1105.77,2820 U2.1 1105.77,2820
NetR21_2: R21.2 U3.3 | length 924.6
  BottomLayer w25: R21.2@2704,2192 2670,2130 ; R21.2@2732,2164 2670,2130 ; 2190,2164.99 2224.99,2130 ; 2190,2164.99 U3.3 ; 2190,2164.99 U3.3 ; U3.3 2224.99,2130 ; 2224.99,2130 2670,2130 ; 2670,2130 R21.2 2670,2130
NetR25_2: R25.2 U4.3 | length 879.9
  BottomLayer w30: U4.3 2376.93,3146.93 2400,3170 2622.8,3170 2682.8,3110 2910,3110 ; R25.2@2950.34,3057.59 2910,3110 ; R25.2@2960.53,3070 2950,3070 2910,3110 ; R25.2 2910,3110 ; R25.2@2971.32,3085.21 2910,3110
VIN0~10V(1): C2.1 C4.1 PAX.11 R11.1 R25.1 | length 2923.9
  TopLayer w25: R11.1 1570.89,3180 C2.1 2612.8,3180 2664.54,3128.26 PAX.11
  BottomLayer w25: PAX.11@2649.8,2963.72 2664.54,3001.74 ; PAX.11 2664.54,3001.74 ; PAX.11@2679.28,2963.72 2664.54,3001.74 ; C4.1@3225.12,2914.12 3240,2960.96 ; C4.1@3240,2911.81 3240,2960.96 ; C4.1@3241.17,2884.99 3336.85,2900 ; C4.1@3241.17,2915.01 3336.85,2900 ; C4.1@3254.88,2914.12 3240,2960.96 ; R25.1@3342.76,3068.14 3362.68,2962.5 R25.1@3382.59,3068.14 ; R25.1 3362.68,2925.83 3336.85,2900 ; 2664.54,3001.74 2702.8,3040 2900,3040 2960,2980 3220.96,2980 3240,2960.96 ; 3240,2960.96 C4.1 3336.85,2900
VIN0~10V(2): C1.1 C3.1 PAX.13 R1.1 R21.1 | length 4576.5
  TopLayer w25: PAX.13 2819.54,2905.96 3004.04,2905.96 3030,2880 3030,2590 3070,2550 3220,2550 3250,2520 C3.1 3332.47,2383.15 3362.68,2352.95 3362.68,2220.32 3322.36,2180 R21.1
  BottomLayer w25: C1.1 1777.37,2390 ; C1.1@1730.93,2390 1777.37,2390 ; C1.1@1733.38,2375.14 1777.37,2390 ; C1.1@1733.38,2404.86 1777.37,2390 ; R21.1@3100.09,2178.14 3120,2072.5 R21.1@3139.91,2178.14 ; R21.1 3120,2060 3061.46,2001.46 1918.54,2001.46 1820,2100 1820,2347.37 1777.37,2390
  BottomLayer w30: R1.1@1589.75,2390 C1.1@1707.31,2390 ; C1.1 R1.1 C1.1@1692.5,2390 ; C1.1@1692.5,2390 1571.25,2407.46 C1.1@1692.5,2390 ; C1.1@1692.5,2390 1571.25,2372.54 C1.1@1692.5,2390
大地: PAX.5

## Polygon pours and split planes (outlines as drawn)
GND on TopLayer "BottomLayer-No Net" (solid, pour order 2): 250,3550 250,3670 cw(c350,3670) 350,3770 540,3770 3410,3770 cw(c3410,3670) 3510,3670 3510,2096.14 3510,2010 cw(c3410,2010) 3410,1910 3390,1910 350,1910 cw(c350,2010) 250,2010 250,2157.42
GND on BottomLayer "BottomLayer-No Net" (solid, pour order 3): 250,3550 250,3670 cw(c350,3670) 350,3770 540,3770 3410,3770 cw(c3410,3670) 3510,3670 3510,2096.14 3510,2010 cw(c3410,2010) 3410,1910 3390,1910 350,1910 cw(c350,2010) 250,2010 250,2157.42

## Keep-outs
KeepOutLayer:
  pour cut-out: 2153.45,3002.37 ccw(c2153.45,2959.18) 2110.26,2959.18 2110.26,2672.37 ccw(c2164.54,2672.37) 2164.54,2618.09 2864.54,2618.09 ccw(c2864.54,2660.96) 2907.41,2660.96 2907.41,2960.96 ccw(c2864.54,2960.96) 2864.54,3003.83 2164.54,3003.83

## Silkscreen, mask and mechanical layers (free items; w line width, h text height)
TopOverlay:
  drawing of 3316 lines, arcs and shapes, not listed
  text "PD1~PD4 4~20mA输出" at 310,3194.78 h120 r270
  text "!!!请注意正负极性!!!" at 220,3100 h120 r270
  text "CL-HC-A-V2.0" at 8719.52,2417.63 h200 r90
  text "CL-AO-VI-V1.0" at 3480,1988.07 h200 r90
Mechanical1:
  circle w10: c118.11,1377.95 r66.93
  circle w10: c3661.42,1377.95 r66.93
  circle w10: c118.11,236.22 r66.93
  circle w10: c3661.42,236.22 r66.93
  circle w10: c3661.42,2125.98 r66.93
  circle w10: c118.11,2125.98 r66.93
  circle w10: c3661.42,3267.72 r66.93
  circle w10: c118.11,3267.72 r66.93
  lines w10: 0,137.8 ccw(c137.8,137.8) 137.8,0 ; 0,1751.97 cw(c137.8,1751.97) 137.8,1889.76 cw(c137.8,2027.56) 0,2027.56 ; 0,3641.73 cw(c137.8,3641.73) 137.8,3779.53 ; 3641.73,0 ccw(c3641.73,137.8) 3779.53,137.8 ; 3641.73,3779.53 cw(c3641.73,3641.73) 3779.53,3641.73 ; 3779.53,1751.97 ccw(c3641.73,1751.97) 3641.73,1889.76 ccw(c3641.73,2027.56) 3779.53,2027.56 ; 0,1889.76 3779.53,1889.76 ; 0,1889.76 0,0 3779.53,0 3779.53,1889.76 ; 0,1889.76 3779.53,1889.76 ; 0,1889.76 0,3779.53 3779.53,3779.53 3779.53,1889.76
  text "PCB名称: CL-AO-VI-V1.0" at -1225.88,3422.53 h120
  text "尺寸： 9.6CM*9.6CM" at -1225.77,3284.62 h120
  text "板材：  FR4" at -1225.77,3145.69 h120
  text "板子层数：  2" at -1225.77,3007.56 h120
  text "板子厚度：  1.6" at -1225.77,2868.39 h120
  text "阻焊颜色：  蓝色" at -1225.88,2730.15 h120
  text "铜箔厚度：  h/hoz" at -1225.88,2590.98 h120
  text "阻焊覆盖：  过孔盖油" at -1225.88,2452.17 h120
  text "字符颜色：  白色" at -1225.77,2314.03 h120
  text "焊盘喷镀：  有铅喷锡" at -1225.77,2174.98 h120
  text "Set： 2" at -1225.88,2030 h120
DrillDrawing:
  text ".legend" at 9670.11,-7402.08 h80

## Text inside footprints (layer, text, board x,y; h text height)
C1: TopOverlay "+" at 1750.62,2390 h60 r270
C2: TopOverlay "+" at 1750.62,3180 h60 r270
C3: TopOverlay "+" at 3281.5,2383.15 h60 r270
C4: TopOverlay "+" at 3240,2868.5 h60 r180
C5: TopOverlay "+" at 2050,3368.5 h60 r180
C6: TopOverlay "+" at 1854.55,2518.5 h60 r180
C7: TopOverlay "+" at 1870.63,2691.89 h60 r90
C8: TopOverlay "+" at 567.31,1998.5 h60 r180
C9: TopOverlay "+" at 567.31,2788.5 h60 r180